# EAGLE board dsbrut (EAGLE 5.06)
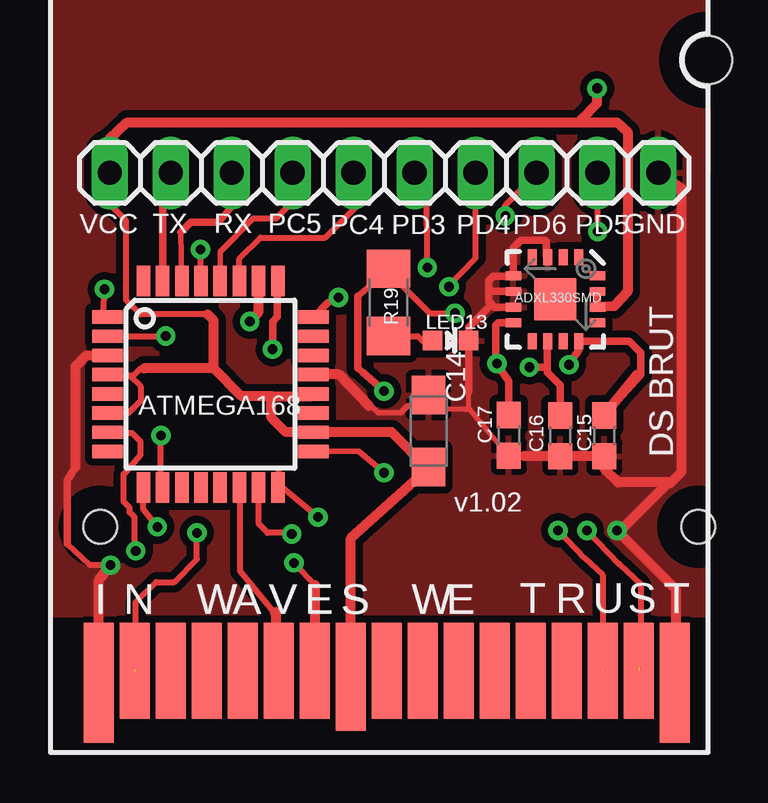
[diagram p0: board, top side]
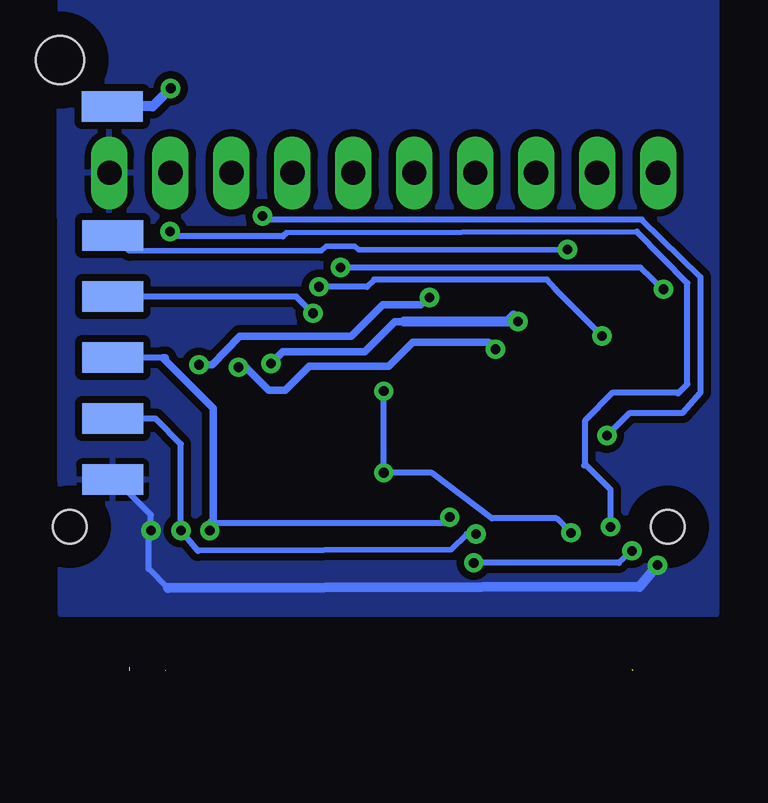
[diagram p1: board, bottom side, seen from below]

No outline drawn. Coordinates in mm, seen from the top.
Copper layers (1*16): Top 0.035mm / dielectric 1.5mm / Bottom 0.035mm
Design rules "default": minimum track width 10mil, minimum drill 24mil, track to track 8mil, track to pad 8mil, pad to pad 8mil, via to via 8mil, smd to smd 8mil, copper to edge 40mil, drill to drill 8mil, minimum pad ring 10mil, minimum via ring 8mil, stop-mask expansion 4mil, vias tented up to drill 0mil, thermal gap 10mil

## Footprints (pad centres in the part's own frame; a part is rotated, then mirrored left to right if it is on the bottom)
SMC_A = smd 1.6 x 1.4: + -1.5,0; - 1.5,0
C0603 = smd 1.1 x 1: 1 -0.85,0; 2 0.85,0
SMD1,27-2,54 = smd 1.27 x 2.54: 1 0,0
1X10 = drill 1.016 long: 1 -11.43,0; 2 -8.89,0; 3 -6.35,0; 4 -3.81,0; 5 -1.27,0; 6 1.27,0; 7 3.81,0; 8 6.35,0; 9 8.89,0; 10 11.43,0
LED-0603 = smd 0.8 x 0.8: A 0,-0.75; C 0,0.75
1206 = smd 1.6 x 1.8: 1 -1.4,0; 2 1.4,0
TQFP32-08 = smd 1.27 x 0.559: 1 -4.293,2.8; 2 -4.293,2; 3 -4.293,1.2; 4 -4.293,0.4; 5 -4.293,-0.4; 6 -4.293,-1.2; 7 -4.293,-2; 8 -4.293,-2.8; 17 4.293,-2.8; 18 4.293,-2; 19 4.293,-1.2; 20 4.293,-0.4; 21 4.293,0.4; 22 4.293,1.2; 23 4.293,2; 24 4.293,2.8 | smd 0.559 x 1.27: 9 -2.8,-4.293; 10 -2,-4.293; 11 -1.2,-4.293; 12 -0.4,-4.293; 13 0.4,-4.293; 14 1.2,-4.293; 15 2,-4.293; 16 2.8,-4.293; 25 2.8,4.293; 26 2,4.293; 27 1.2,4.293; 28 0.4,4.293; 29 -0.4,4.293; 30 -1.2,4.293; 31 -2,4.293; 32 -2.8,4.293
M3_CARTRIDGE = smd 1.25 x 5: 1 1.975,3; 17 25.975,3 | smd 1.25 x 4: 2 3.475,3.5; 3 4.975,3.5; 4 6.475,3.5; 5 7.975,3.5; 6 9.475,3.5; 7 10.975,3.5; 9 13.975,3.5; 10 15.475,3.5; 11 16.975,3.5; 12 18.475,3.5; 13 19.975,3.5; 14 21.475,3.5; 15 22.975,3.5; 16 24.475,3.5 | smd 1.25 x 4.5: 8 12.475,3.25 | hole 1.4: 2.025,9.5; 26.95,9.5 | hole 2: 27.35,28.95
LFCSP-16 = smd 1.75 x 1.75: 0 0,0 | smd 0.65 x 0.37: 1 -1.75,0.975; 2 -1.75,0.325; 3 -1.75,-0.325; 4 -1.75,-0.975; 9 1.75,-0.975; 10 1.75,-0.325; 11 1.75,0.325; 12 1.75,0.975 | smd 0.37 x 0.65: 5 -0.975,-1.75; 6 -0.325,-1.75; 7 0.325,-1.75; 8 0.975,-1.75; 13 0.975,1.75; 14 0.325,1.75; 15 -0.325,1.75; 16 -0.975,1.75

## Placement (x,y rotation side)
C14  10uF  [SMC_A]  15.76,13.4 90 top
C15  100n  [C0603]  23.09,13.2 90 top
C16  100n  [C0603]  21.26,13.2 90 top
C17  100nF  [C0603]  19.11,13.22 270 top
GND1  [SMD1,27-2,54]  25.21,11.38 270 bottom
GND10  [SMD1,27-2,54]  25.22,26.93 270 bottom
JP13  [1X10]  13.91,24.16 0 top
LED13  [LED-0603]  16.68,17.17 270 top
MISO1  [SMD1,27-2,54]  25.21,16.46 270 bottom
MOSI1  [SMD1,27-2,54]  25.21,13.92 270 bottom
R19  220R  [1206]  14.09,18.76 270 top
RST1  [SMD1,27-2,54]  25.21,21.54 270 bottom
SCK1  [SMD1,27-2,54]  25.21,19 270 bottom
U$15  ATMEGA168  [TQFP32-08]  6.68,15.35 0 top
U$16  M3_CARTRIDGE  [M3_CARTRIDGE]  0.05,-0.09 0 top
U$17  ADXL330SMD  [LFCSP-16]  21.05,18.89 270 top

## Library data of the parts
C14-C17 = rcl
GND1 GND10 MISO1 MOSI1 RST1 SCK1 = wirepad
JP13 = pinhead
LED13 R19 U$15 = SparkFunEagle-6-6-07
U$16 = nds_cart1
U$17 = SparkFun

## Nets
CS2: U$15.14 U$16.6
GND4: C14.- C15.1 C16.1 C17.2 GND1.1 JP13.10 LED13.C U$15.3 U$15.21 U$16.1 U$16.17 U$17.3 U$17.5 U$17.6 U$17.7
IRQ2: U$15.7 U$16.7
MISO4: MISO1.1 U$15.16 U$16.15
MOSI4: MOSI1.1 U$15.15 U$16.16
N$44: LED13.A R19.2
N$45: C16.2 U$15.25 U$17.10
N$46: C15.2 U$15.24 U$17.12
N$47: C17.1 U$15.26 U$17.8
PC4: JP13.5 U$15.27
PC5: JP13.4 U$15.28
PD3: JP13.6 U$15.1
PD4: JP13.7 U$15.2
PD5: JP13.9 U$15.9
PD6: JP13.8 U$15.10
RST3: RST1.1 U$15.29
RX4: JP13.3 U$15.30
SCK4: R19.1 SCK1.1 U$15.17 U$16.2
TX4: JP13.2 U$15.31
VCC4: C14.+ GND10.1 JP13.1 U$15.4 U$15.6 U$15.18 U$15.20 U$16.8 U$17.14 U$17.15

## Tracks (layer width: path | path; a pad name or v marks a point on that pad's centre or on a via)
CS2
  Top 0.254: 9.46,5.72 9.36,5.81 7.91,7.56 7.91,11.06
  Top 0.406: 7.91,11.06 U$15.14 | 9.41,5.81 9.41,5.86 | 9.41,5.81 9.36,5.81 | 9.41,3.46 9.41,3.41 | 9.41,3.46 9.41,5.81 | U$16.6 9.48,3.46 9.41,3.46
GND4  (via drill 0.4)
  Top 0.203: 15.91,14.91 16.51,14.31 17.21,14.31 | 17.21,14.31 17.41,14.31 17.43,14.33 17.43,15.04 | C17.2 17.48,14.31 17.21,14.31
  Top 0.229: 13.31,14.46 13.36,14.46 13.66,14.16 14.61,14.16 14.9,14.45 15.31,14.45 | 13.31,14.46 13.26,14.51 | 13.27,14.45 13.3,14.45 13.31,14.46
  Top 0.254: 26.06,3.06 26.01,3.01 26.03,3 U$16.17 26.03,2.9 26.06,2.86 | JP13.10 25.31,24.16 25.26,24.16 25.21,24.21 | C14.- 15.82,14.9 15.86,14.86 15.91,14.91 | v23.61,9.26 23.46,9.41 | v2.51,7.81 1.66,7.81 0.71,8.71
  Top 0.305: 10.97,15.72 10.96,15.71 | 10.97,15.72 U$15.21 | 11.01,15.76 10.97,15.72 | 1.06,11.91 0.71,11.36 0.71,8.71 | U$17.7 18.51,18.57 18.39,18.69 | 18.39,18.69 18.26,18.81 18.26,19.21 | 18.26,19.21 18.26,19.66 18.46,19.86 U$17.5 | U$17.5 | U$17.6 18.27,19.22 18.26,19.21 | U$17.5 19.3,21.05 19.61,21.36 20.61,21.36 20.66,21.31 20.66,20.71 U$17.3 | C15.1 C16.1 | 19.74,12.35 C17.2 | 17.43,15.04 LED13.C 17.43,17.73 18.39,18.69 | C14.- 15.31,14.45
  Top 0.406: 13.27,14.45 12.01,15.76 11.01,15.76 | 25.31,24.16 26.31,23.51 26.31,11.71 25.81,11.21 25.76,11.26 | 26.06,2.86 26.06,6.81 v23.61,9.26 23.76,9.26 25.76,11.26 | U$16.1 2.03,7.18 v2.51,7.81 | U$15.3 1.5,16.55 1.06,16.11 1.06,11.91 | 19.74,12.35 C15.1 23.09,11.83 23.66,11.26 25.76,11.26
  Bottom 0.254: 25.01,11.16 25.21,11.36 GND1.1 25.21,11.41 25.16,11.46 23.61,9.91 v23.61,9.26 23.61,9.21 23.71,9.11 23.71,7.66 22.91,6.86
  Bottom 0.406: 22.91,6.86 3.26,6.91 v2.51,7.81
  pour Top (isolate 0.305): 0.06,5.76 27.36,5.76 27.41,27.76 arc-90 26.31,28.86 26.31,29.01 arc-90 27.31,30.01 27.36,31.41 0.06,31.41
  pour Bottom (isolate 0.305): 0.06,5.76 27.36,5.76 27.41,27.76 arc-90 26.31,28.86 26.31,29.01 arc-90 27.31,30.01 27.41,30.01 27.36,31.41 0.06,31.41
IRQ2  (via drill 0.4)
  Top 0.254: v10.16,7.91 11.03,7 | 2.39,13.29 2.36,13.26 | 2.39,13.29 U$15.7 | 2.39,13.29 2.41,13.31 3.41,13.31 3.76,12.96 3.76,12.41 3.16,11.71 3.06,11.61 3.06,10.46 3.31,10.21 3.31,10.01 3.51,9.81 3.51,8.46 v3.56,8.41
  Top 0.406: 11.03,7 U$16.7
  Bottom 0.254: v10.16,7.91 4.11,7.91 v3.56,8.41
MISO4  (via drill 0.4)  (1 unrouted)
  Top 0.254: 9.51,11.76 9.51,11.06 9.66,11.06 v11.16,9.81 | v21.16,9.26 22.26,8.11 23.01,7.41 23.01,3.61 23.11,3.51 23.03,3.43
  Top 0.406: 9.51,11.06 U$15.16
  Bottom 0.254: 23.11,16.46 MISO1.1 | v21.16,9.26 21.16,9.56 11.21,9.56 10.96,9.81 v11.16,9.81
  Bottom 0.305: 23.01,16.46 23.11,16.46 21.01,14.36 21.01,9.71 21.16,9.56
MOSI4  (via drill 0.4)  (1 unrouted)
  Top 0.254: U$15.15 8.68,9.54 9.06,9.16 10.01,9.16 v10.06,9.11 | v22.36,9.26 23.71,7.86 24.61,7.01 24.61,3.66 24.51,3.56 24.53,3.55
  Bottom 0.254: v10.06,9.11 10.46,9.11 11.11,8.46 21.66,8.41 v22.36,9.26 22.31,9.31 22.36,9.36 22.36,12.86 23.42,13.92 MOSI1.1
N$44
  Top 0.254: 15.45,17.22 15.51,17.16 | 15.45,17.22 LED13.A | R19.2 15.31,17.36 15.45,17.22
N$45  (via drill 0.4)
  Top 0.305: C16.2 21.26,15.32 20.71,15.86 20.71,16.06 | U$17.10 20.71,17.13 20.71,16.06 | v19.96,16.06 20.71,16.06 | v9.26,16.81 9.26,17.96 9.46,18.16 9.46,19.62 U$15.25
  Bottom 0.305: v19.96,16.06 19.66,16.06 18.71,15.11 18.01,15.11 17.01,16.11 13.71,16.11 12.71,17.11 9.56,17.11 v9.26,16.81
N$46  (via drill 0.4)
  Top 0.305: C15.2 24.61,15.74 24.61,16.66 24.13,17.14 U$17.12 22.03,16.78 v21.61,16.16 | v12.01,18.96 11.56,18.74 U$15.24
  Top 0.406: C15.2 24.44,15.73
  Bottom 0.305: v21.61,16.16 21.06,16.16 19.91,17.36 15.26,17.36 13.96,18.66 12.36,18.66 v12.01,18.96
N$47  (via drill 0.4)
  Top 0.305: U$17.8 18.67,17.92 18.56,17.81 18.56,16.26 v18.61,16.21 19.11,15.47 C17.1
  Top 0.406: U$15.26 8.68,18.38 v8.31,17.96
  Bottom 0.305: 13.06,17.96 13.46,17.96 14.71,16.71 18.11,16.71 v18.61,16.21
  Bottom 0.406: v8.31,17.96 8.51,18.21 8.76,17.96 13.06,17.96
PC4
  Top 0.254: U$15.27 7.88,20.58 8.76,21.46 11.46,21.46 12.71,22.71 12.71,24.01 12.61,24.11 12.64,24.14 JP13.5
PC5
  Top 0.229: U$15.28 7.08,20.88 8.46,22.26
  Top 0.254: 8.46,22.26 9.41,22.26 10.11,22.96 10.11,23.96 10.21,24.06 10.11,24.16 JP13.4
PD3  (via drill 0.4)
  Top 0.254: JP13.6 15.68,23.69 v15.71,20.21 | U$15.1 2.45,18.15 2.46,18.16 2.21,18.31 v2.26,19.31
  Bottom 0.254: v15.71,20.21 3.21,20.21 v2.26,19.31
PD4  (via drill 0.4)
  Top 0.254: U$15.2 2.42,17.35 2.46,17.31 2.51,17.36 v4.81,17.36 | v16.61,19.41 16.46,19.31 17.72,20.62 JP13.7
  Bottom 0.254: v4.81,17.36 6.76,19.31 7.11,19.71 14.31,19.71 14.61,19.41 v16.61,19.41
PD5  (via drill 0.4)
  Top 0.254: U$15.9 3.88,10.14 v4.46,9.41 | JP13.9 22.8,24.07 22.86,24.01 22.81,23.96 v22.81,21.71
  Bottom 0.229: 3.36,21.71 17.96,21.66
  Bottom 0.254: v4.46,9.41 4.46,10.96 5.51,12.01 | 17.96,21.66 18.11,21.51 22.61,21.51 v22.81,21.71 | 22.86,24.21 JP13.9 | 5.51,12.01 5.51,13.86 4.36,15.01 1.66,15.01 1.66,14.96 1.26,15.36 1.26,19.56 3.36,21.71 | 5.51,12.01 5.56,11.96
PD6  (via drill 0.4)
  Top 0.254: JP13.8 20.31,24.16 18.96,22.81 v18.96,22.36 | U$15.10 4.68,11.08 4.71,11.11 4.61,11.21 v4.61,13.21
  Bottom 0.254: v18.96,22.36 18.91,22.21 3.16,22.21 0.71,19.81 0.71,15.01 1.46,14.16 3.66,14.16 v4.61,13.21
RST3  (via drill 0.4)
  Top 0.254: U$15.29 6.28,20.88 v6.26,20.96
  Bottom 0.229: v6.26,20.96 14.96,20.96 15.11,21.11 16.31,21.11 16.51,20.91 24.51,20.91 24.61,21.01
  Bottom 0.254: 25.24,21.54 25.26,21.56 | 25.24,21.54 RST1.1 | 24.61,21.01 25.24,21.54
RX4
  Top 0.229: U$15.30 5.43,21.68
  Top 0.305: 5.43,21.68 5.86,22.11 7.01,22.11 7.56,22.76 7.56,23.91 7.51,23.96 7.56,24.01 JP13.3
S$56  (1 unrouted)
SCK4  (via drill 0.4)  (1 unrouted)
  Top 0.254: U$15.17 12.87,12.55 v13.91,11.66 | v6.11,9.16 6.11,8.06 5.16,7.11 4.41,7.11 3.56,6.26 3.56,3.46 3.61,3.41 | v16.86,18.31 15.81,18.31 13.96,20.16 R19.1 14.21,20.21 12.81,19.01
  Top 0.305: 12.81,19.01 12.81,16.01 13.01,15.86 13.51,15.41 v13.91,15.06
  Bottom 0.254: v6.11,9.16 6.71,9.76 9.41,9.76 11.91,11.66 v13.91,11.66 v13.91,15.06 | SCK1.1 17.55,19 v16.86,18.31
TX4
  Top 0.305: JP13.2 5.11,24.16 4.68,23.73 U$15.31
VCC4  (via drill 0.41)
  Top 0.254: JP13.1 2.48,22.84 3.16,22.16 3.16,18.86 3.76,18.26 6.56,18.26 | 2.46,15.71 2.42,15.75 U$15.4 | 2.46,15.71 3.46,15.71 3.76,16.01 3.81,16.01 3.86,15.96 3.91,16.01 | 15.71,11.86 C14.+ 15.76,11.86 | 2.46,15.71 3.31,15.71 3.76,15.26 3.76,14.66 3.26,14.16 2.56,14.16 2.46,14.06 2.39,14.13 U$15.6
  Top 0.305: U$17.14 U$17.15 | 2.46,25.56 2.46,24.18 JP13.1
  Top 0.406: 11,14.95 11.01,14.96 | 11,14.95 U$15.20 | 11,14.95 10.91,14.86 9.21,14.86 | 9.21,14.86 7.96,14.86 6.81,16.01 | 6.81,16.01 3.91,16.01 | 9.21,14.86 9.21,13.96 9.82,13.35 U$15.18 14.22,13.35 15.71,11.86 | 6.56,18.26 6.81,18.01 6.81,16.01 | U$16.8 12.53,8.93 15.76,11.86 | U$17.14 23.5,18.6 24.06,19.21 24.06,25.86 23.61,26.26 22.16,26.26 | 22.16,26.26 3.21,26.26 2.46,25.56 | 22.16,26.26 22.16,26.42 22.79,27.05 v22.79,27.68
  Bottom 0.406: GND10.1 23.55,26.93 v22.79,27.68

## Text on the board
tPlace: VCC | TX | RX | PC5 | PC4 | PD3 | PD4 | PD6 | PD5 | GND | DS BRUT | v1.02
_tsilk: VCC | TX | RX | PC5 | PC4 | PD3 | PD4 | PD6 | PD5 | GND | R19 | ADXL330SMD | LED13 | C14 | ATMEGA168 | C17 | C16 | C15 | DS BRUT | v1.02 | I | N | W | A | V | E | S | W | E | T | R | U | S | T